# Altium PCB switch-acdetect.PcbDoc
Units mm, origin at the board's own origin, x right, y up, seen from the top; angles counter-clockwise.
Board outline 49.78 x 65.02 mm, 2 copper layers (Top Layer, Bottom Layer); 21 components, 17 nets, 56 pads, 0 vias.
Unrouted connection lines stored in the file: 1.
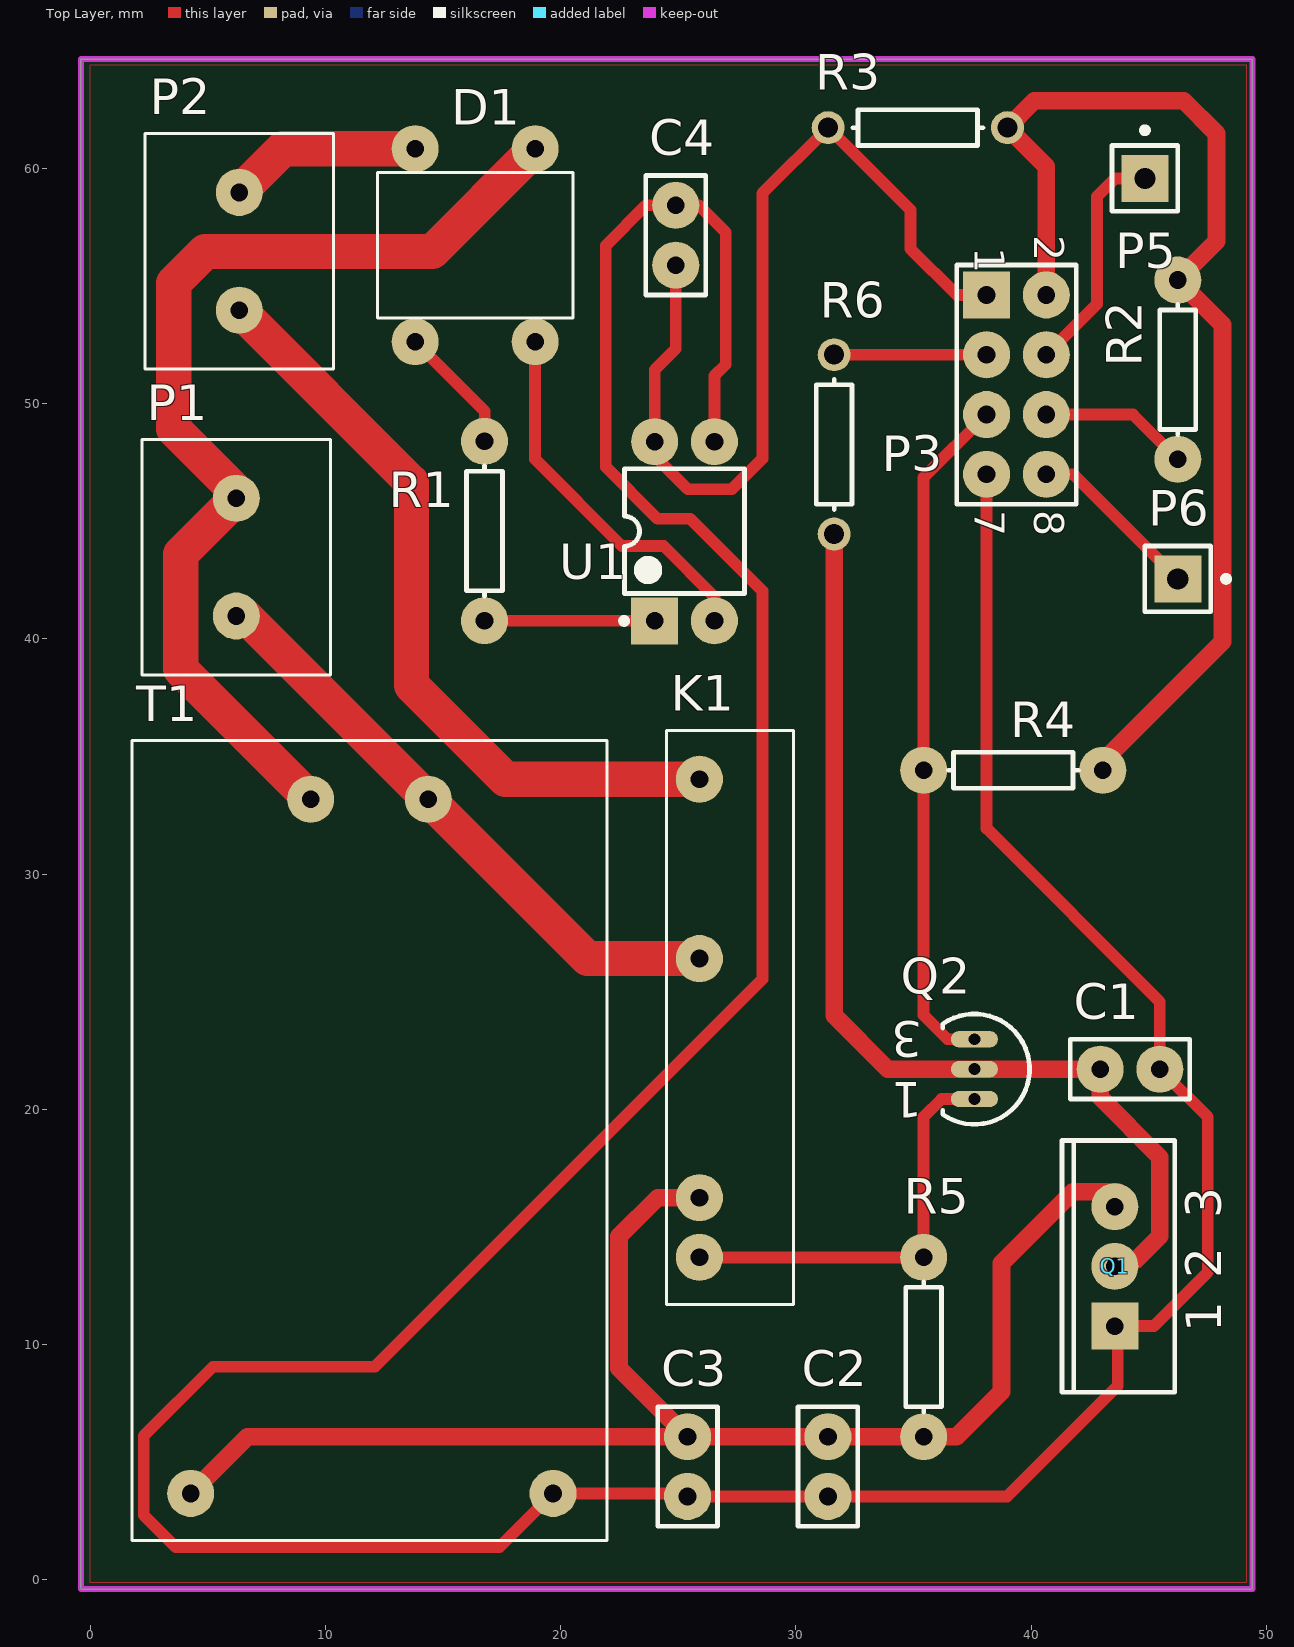
[diagram p0: Top Layer view]
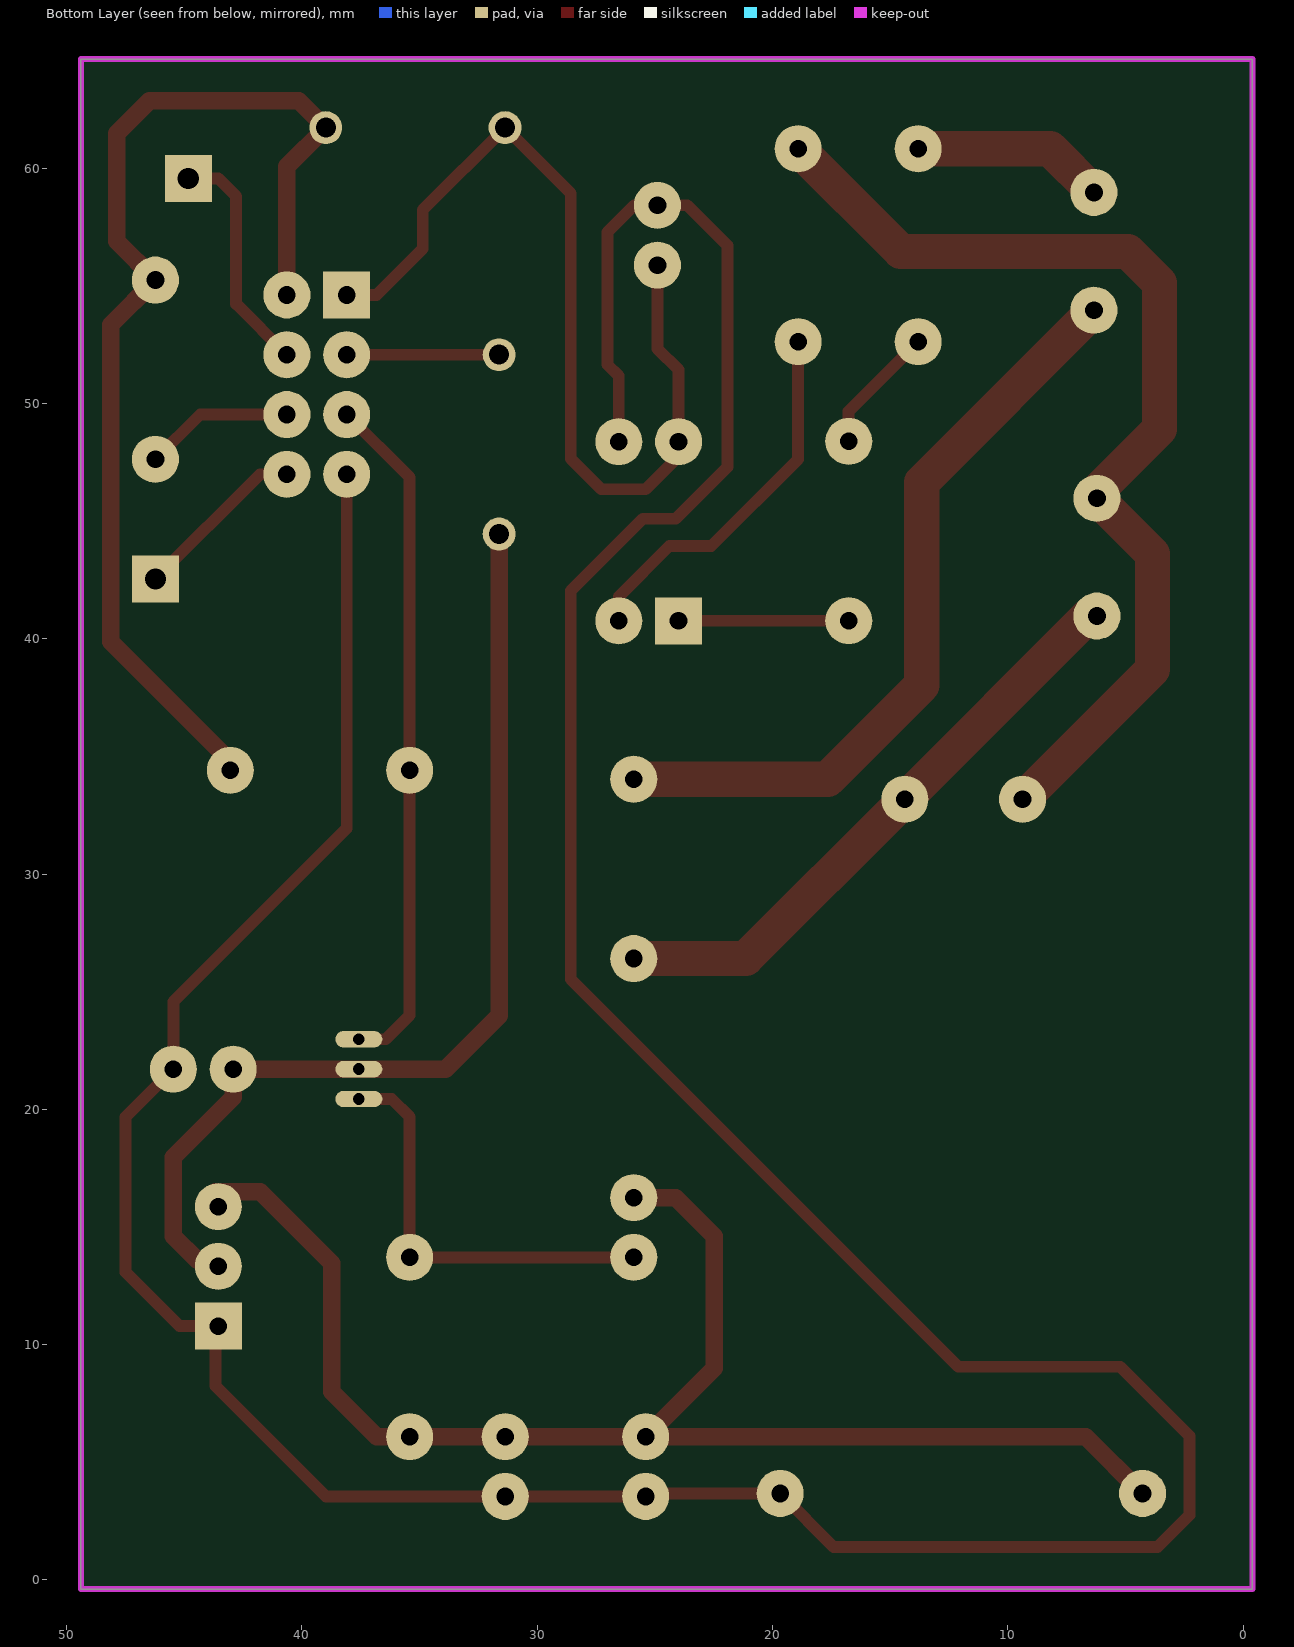
[diagram p1: Bottom Layer view, seen from below]

## Layer stack, top to bottom
Top Solder: solder mask 0.0102, Solder Resist, Dk 3.5
Top Layer: signal copper 0.0356
Dielectric 1: dielectric 0.32, FR-4, Dk 4.8
Bottom Layer: signal copper 0.0356
Bottom Solder: solder mask 0.0102, Solder Resist, Dk 3.5

## Board outline
-0.388,-0.388 -0.388,64.636 49.396,64.636 49.396,-0.388

## Design rules (kind name [scope] priority, off if disabled: settings)
Clearance [All] p1: gap=0.5 ignorepadtopadclearanceinfootprint=FALSE
PolygonConnect [All] p1: connectstyle=Relief reliefconductorwidth=0.254 reliefentries=4 polygonreliefangle="90 Angle" airgapwidth=0.254
RoutingLayers [All] p1: top layer_v5=TRUE bottom layer_v5=FALSE
RoutingVias [All] p1: holewidth=0.711 width=1.27 viastyle="Through Hole" minholewidth=0.711 minwidth=1.27 maxholewidth=0.711 maxwidth=1.27
SolderMaskExpansion [All] p1: expansion=0.102
Width "Schematic Width Constraint_5" [InNet('AC GND')] p1: maxlimit=1.5 minlimit=1.5 preferedwidth=1.5
Width "Schematic Width Constraint_4" [InNet('220VAC')] p2: maxlimit=1.5 minlimit=1.5 preferedwidth=1.5
Width "Schematic Width Constraint_3" [InNet('Assett Detection')] p3: maxlimit=1.5 minlimit=1.5 preferedwidth=1.5
Width "Schematic Width Constraint_2" [InNet('Load')] p4: maxlimit=1.5 minlimit=1.5 preferedwidth=1.5
Width "Schematic Width Constraint_1" [InNet('+3.3VDC')] p5: maxlimit=75 minlimit=0.5 preferedwidth=0.75 bottomlayer_minwidth=0.508 bottomlayer_maxwidth=0.762 bottomlayer_prefwidth=0.635 minimp=50.000000 maximp=50.000000 favimp=50.000000
Width "Schematic Width Constraint" [InNet('+5VDC')] p6: maxlimit=0.762 minlimit=0.5 preferedwidth=0.75 toplayer_maxwidth=0.75 bottomlayer_minwidth=0.508 bottomlayer_prefwidth=0.635 minimp=50.000000 maximp=50.000000 favimp=50.000000
Width [All] p7: maxlimit=1 minlimit=0.4 preferedwidth=0.5
29 further rules are at their usual default settings.

## Components (designator, comment, footprint, x,y, rotation, side; value= is the part's Value field where it differs from the comment)
C1 "100nf" RAD-0.1 44.196,21.71 r180 top value=100nF
C2 "Cap Pol1" RAD-0.1 31.362,4.819 r270 top value=100uf
C3 "Cap" RAD-0.1 25.393,4.819 r270 top value=100nf
C4 "Cap Pol1" RAD-0.1 24.892,57.15 r90 top value=1uf
D1 "Bridge" DB157 18.916,60.826 r180 top
K1 "G3MB-202P DC5" "G3MB-202P DC5" 29.901,11.709 r90 top
P1 "Power" ScrewTerminal-X2 10.216,38.467 r90 top
P2 "Power" ScrewTerminal-X2 2.343,61.468 r270 top
P3 "ESP01" HDR2X4 38.1,54.61 r270 top
P5 "Plug" PIN1 44.831,59.563 r0 top
P6 "Plug" PIN1 46.228,42.545 r270 top
Q1 "Regulador 3.3V" TO-220-AB 43.554,13.328 r90 top
Q2 "2N7000" TO-92 37.585,21.71 r180 top
R1 "10K" AXIAL-0.3#1 16.764,44.577 r270 top value=220K
R2 "10K" AXIAL-0.3#1 46.228,51.435 r270 top value=1K
R3 "10K" AXIAL-0.3#2 35.179,61.722 r180 top value=220K
R4 "10K" AXIAL-0.3#1 39.236,34.41 r0 top
R5 "10K" AXIAL-0.3#1 35.426,9.899 r270 top
R6 "10K" AXIAL-0.3#2 31.623,48.26 r90 top
T1 "220VAC - 5VDC" HLK-PM 14.378,33.176 r270 top
U1 "Optoisolator1" DIP-4 25.266,44.57 r90 top

## Footprints (in the part's own frame and the unit in brackets; to place one, negate y for a bottom-side part, rotate by r counter-clockwise, add the part's x,y. Pads: shape width x height; smd on the part's side, far side on the other; paste and mask are expansions set on the pad)
AXIAL-0.3#1 [mm] "Axial Device, Thru-Hole; 2 Leads; 0.3 in Pin Spacing"
  round 2 hole 0.75: 1(-3.81,0) 2(3.81,0)
  silkscreen extent -2.77,-0.76 2.77,0.76
AXIAL-0.3#2 [mm] "Axial Device, Thru-Hole; 2 Leads; 0.3 in Pin Spacing"
  round 1.4 hole 0.85: 1(-3.81,0) 2(3.81,0)
  silkscreen extent -2.77,-0.76 2.77,0.76
DB157 [mm] "AC to DC bridge"
  round 2 hole 0.75: 1(0,0) 2(5.1,0) 3(5.1,8.2) 4(0,8.2)
  silkscreen extent -1.6,1 6.7,7.2
DIP-4 [mm] "DIP; 4 Leads; Row Spacing 7.62 mm; Pitch 2.54 mm"
  rect 2x2 hole 0.75: 1(-3.81,1.27)
  round 2 hole 0.75: 2(-3.81,-1.27) 3(3.81,-1.27) 4(3.81,1.27)
  silkscreen extent -3.93,-2.55 2.65,2.69, body extent -3.15,-2.5 3.15,2.5, height 5.6
"G3MB-202P DC5" [mm] "RELAY MINI SSR 240VAC@2A ZERO"
  round 2 hole 0.75: 1(22.32,4) 2(14.7,4) 3(4.54,4) 4(2,4)
  silkscreen extent 0,0 24.4,5.4
HDR2X4 [mm] "Connector; Header; 4x2 Position"
  rect 2x2 hole 0.75: 1(0,0)
  round 2 hole 0.75: 2(0,2.54) 3(2.54,0) 4(2.54,2.54) 5(5.08,0) 6(5.08,2.54) 7(7.62,0) 8(7.62,2.54)
  silkscreen extent -1.27,-1.27 8.89,3.81
HLK-PM [mm] "Trans 220VAC-5/12/3,3 VDC"
  round 2 hole 0.75: 1(0,0) 2(0,-5) 3(29.5,5.3) 4(29.5,-10.1)
  silkscreen extent -2.5,-12.6 31.5,7.6
PIN1 [mm] "Connector; Plug"
  rect 2x2 hole 0.9: 1(0,0)
  silkscreen extent -1.4,-1.4 1.4,2.17
RAD-0.1 [mm] "Radial Cap, Thru-Hole; 2 Leads; 0.1 in Pin Spacing"
  round 2 hole 0.75: 1(-1.27,0) 2(1.27,0)
  silkscreen extent -2.54,-1.27 2.54,1.27
ScrewTerminal-X2 [mm]
  round 2 hole 0.75: 1(2.5,4) 2(7.5,4)
  silkscreen extent 0,0 10,8
TO-92 [mm] "TO, Flat Index; 3 In-Line, Axial Leads; Body Dia. 4.6mm; Leads 0.41 x 0.39 mm (max)"
  oval 2x0.7 hole 0.5: 1(0,1.27) 2(0,0) 3(0,-1.27)
  silkscreen extent -2.34,-2.34 1.35,2.34
TO-220-AB [mm] "TO, Thru-Hole, Vertical, Heatsink Mounted; 3 In-Line Leads; Pitch 2.54 mm"
  rect 2x2 hole 0.75: 1(-2.54,0)
  round 2 hole 0.75: 2(0,0) 3(2.54,0)
  silkscreen extent -5.35,-2.55 5.35,2.25

## Part data
C1: library part Cap, "Capacitor", LatestRevisionDate=17-Jul-2002, LatestRevisionNote="Re-released for DXP Platform.", PackageDescription="Radial Cap, Thru-Hole; 2 Leads; 0.3 in Pin Spacing", PackageReference=RAD-0.3, Published=8-Jun-2000, Publisher="Altium Limited"
C2 C4: "Polarized Capacitor (Radial)", LatestRevisionDate=17-Jul-2002, LatestRevisionNote="Re-released for DXP Platform.", PackageDescription="Polarized Capacitor (Radial); 2 Leads", PackageReference=RB7.6-15, Published=8-Jun-2000, Publisher="Altium Limited"
C3: "Capacitor", LatestRevisionDate=17-Jul-2002, LatestRevisionNote="Re-released for DXP Platform.", PackageDescription="Radial Cap, Thru-Hole; 2 Leads; 0.3 in Pin Spacing", PackageReference=RAD-0.3, Published=8-Jun-2000, Publisher="Altium Limited"
D1: library part Bridge2, "Diode Bridge", LatestRevisionDate=17-Jul-2002, LatestRevisionNote="Re-released for DXP Platform.", PackageDescription="Bridge Rectifier; 4 Terminals; Body 16.8 x 16.8 mm (typ); Pitch 10.67 mm", PackageReference=D-46_6A, Published=24-Mar-1999, Publisher="Altium Limited"
K1: "RELAY MINI SSR 240VAC@2A ZERO", Mfr=Omron, Mfr PN="G3MB-202P DC5"
P1 P2: library part ScrewTerminal
Q1: library part AMS1117
Q2: "N-channel Enhancement Mode Field-effect Transistor", Code_JEDEC=TO-92, Code_JEITA=SC-43, ComponentLink1Description="Manufacturer Link", ComponentLink1URL=http://www.semiconductors.philips.com/, ComponentLink2Description=Datasheet, ComponentLink2URL=http://www.semiconductors.philips.com/acrobat/datasheets/2N7000-03.pdf, DatasheetVersion=19-May-2000, LatestRevisionDate=12-Dec-2006, LatestRevisionNote="Footprint pad sequence fixed.", PackageDescription="Plastic Single-Ended Leaded (through hole) package; 3 Leads (TO-92)", PackageReference=SOT54, PackageVersion=Feb-1997, Published=17-Sep-2003, Publisher="Altium Limited"
R1 R2 R3 R4 R5 R6: library part Res1, "Resistor", LatestRevisionDate=17-Jul-2002, LatestRevisionNote="Re-released for DXP Platform.", PackageDescription="Axial Device, Thru-Hole; 2 Leads; 0.3 in Pin Spacing", PackageReference=AXIAL-0.3, Published=8-Jun-2000, Publisher="Altium Limited"
T1: library part HLK-PM, "HLK-PM*", Mfr=HLK-PM01
U1: "4-Pin Phototransistor Optocoupler", DatasheetVersion=Nov-2003, LatestRevisionDate=04-Mar-2005, LatestRevisionNote="Sch pins 3 & 4 Swapped.", PackageReference=DIP-4, Published=24-Mar-1999, Publisher="Altium Limited"
P5 P6: LatestRevisionDate=17-Jul-2002, LatestRevisionNote="Re-released for DXP Platform.", Publisher="Altium Limited"

## Nets (pads, with @x,y where several pads share a name; then routed paths per layer and width w, separated by ;. In a path a pad name is that pad's centre, name@x,y a point inside that pad or via, vN(x,y) a via of type N, cw(c..) or ccw(c..) an arc to the next point about the centre after c; other vN are vias at no path point)
220VAC: K1.2 P1.1 T1.1 | length 25.7
  Top Layer w1.5: P1.1 6.587,40.967 T1.1 21.145,26.409 K1.2
+3.3VDC: C1.2 P3.2 Q1.2 Q2.2 R2.1 R3.1 R4.2 R6.1 | length 91.3
  Top Layer w0.75: R6.1 31.623,23.988 33.902,21.71 Q2.2 C1.2 42.926,20.508 45.466,17.968 45.466,14.605 44.443,13.582 Q1.2@43.935,13.582 ; P3.2 40.64,60.071 R3.1 40.132,62.865 46.482,62.865 47.872,61.475 47.872,56.889 R2.1 48.126,53.347 48.126,39.871 R4.2@42.665,34.41
+5VDC: C2.1 C3.1 K1.3 Q1.3 R5.2 T1.4 | length 61.7
  Top Layer w0.75: T1.4 6.691,6.089 C3.1 ; K1.3 24.123,16.249 22.479,14.605 22.479,9.002 C3.1 ; Q1.3@43.681,16.503 41.776,16.503 38.735,13.462 38.735,8.001 36.823,6.089 R5.2 C2.1 C3.1
"AC GND": D1.1 P1.2 T1.2 | length 44
  Top Layer w1.5: T1.2 3.853,38.7 3.853,43.604 P1.2 6.216,46.253 3.556,48.913 3.556,55.118 4.895,56.457 14.547,56.457 D1.1
"Assett Detection": D1.2 P2.1 | length 8.2
  Top Layer w1.5: P2.1 8.201,60.826 D1.2
GND: C1.1 C2.2 C3.2 C4.2 P3.7 Q1.1 T1.3 U1.3 | length 178.6
  Top Layer w0.5: U1.3 26.536,51.174 27.018,51.656 27.018,57.277 25.875,58.42 C4.2 23.622,58.42 21.913,56.711 21.913,47.302 24.113,45.102 25.51,45.102 28.575,42.037 28.575,25.527 12.108,9.06 5.225,9.06 2.286,6.121 2.286,2.754 3.643,1.397 17.399,1.397 T1.3 25.266,3.676 C3.2 C2.2 38.982,3.549 43.681,8.248 Q1.1@43.681,10.788 ; P3.7 38.1,31.938 45.466,24.572 C1.1 47.498,19.678 47.498,13.081 45.205,10.788 Q1.1@43.681,10.788 ; Q1.1 Q1.1@43.681,10.788 ; Q1.1@43.681,11.423 Q1.1@43.681,10.788
Load: K1.1 P2.2 | length 32.9
  Top Layer w1.5: P2.2 13.662,46.648 13.662,38.022 17.655,34.029 K1.1
NetC4_1: C4.1 P3.1 R3.2 U1.4 | length 40.1
  Top Layer w0.5: C4.1 24.892,52.324 23.996,51.428 U1.4 23.996,47.759 25.4,46.355 27.28,46.355 28.575,47.65 28.575,58.928 R3.2 34.867,58.224 34.867,56.573 36.83,54.61 P3.1
NetD1_1: D1.4 U1.2 | length 16.1
  Top Layer w0.5: D1.4 18.916,47.632 22.606,43.942 24.384,43.942 26.536,41.79 U1.2
NetD1_3: D1.3 R1.1 | length 5.7
  Top Layer w0.5: D1.3 16.771,49.67 R1.1@16.771,48.38 ; R1.1 R1.1@16.771,48.38 ; R1.1@17.011,48.38 R1.1@16.771,48.38
NetK1_4: K1.4 Q2.1 R5.1 | length 17.8
  Top Layer w0.5: K1.4 R5.1 ; R5.1@35.426,13.836 35.426,19.678 36.188,20.44 Q2.1
NetP3_1: P3.8 P6.1 | length 7.4
  Top Layer w0.5: P3.8 41.783,46.99 P6.1
NetP3_2: P3.6 R2.2 | length 6.4
  Top Layer w0.5: P3.6 44.323,49.53 R2.2
NetP3_3: P3.4 P5.1 | length 10
  Top Layer w0.5: P3.4 42.799,54.229 42.799,58.801 43.561,59.563 P5.1
NetP3_6: P3.5 Q2.3 R4.1 | length 29.2
  Top Layer w0.5: Q2.3 36.442,22.98 35.426,23.996 R4.1 35.426,46.856 P3.5
NetP3_7: P3.3 R6.2 | length 6.5
  Top Layer w0.5: R6.2@31.641,52.07 P3.3
NetR1_2: R1.2 U1.1 | length 7.2
  Top Layer w0.5: R1.2 23.988,40.767 U1.1

## Polygon pours and split planes (outlines as drawn)
GND on Top Layer "GND" (solid, shelved, pour order 0): 0,64.393 49.142,64.385 49.142,-0.127 0,-0.127 0,3.81

## Keep-outs
Keep-Out Layer:
  the board outline again, w0.254

## Text inside footprints (layer, text, board x,y; h text height)
P3: Top Overlay "8" at 40.132,45.466 h1.27 r270; Top Overlay "7" at 37.592,45.466 h1.27 r270; Top Overlay "1" at 37.592,56.642 h1.27 r270; Top Overlay "2" at 40.132,57.15 h1.27 r270
Q1: Top Overlay "3" at 48.079,15.368 h1.5 r90; Top Overlay "2" at 48.079,12.828 h1.5 r90; Top Overlay "1" at 48.079,10.538 h1.5 r90
Q2: Top Overlay "1" at 35.361,21.15 h1.5 r180; Top Overlay "3" at 35.361,23.745 h1.5 r180